# EAGLE board tudoJunto (EAGLE 9.6.2)
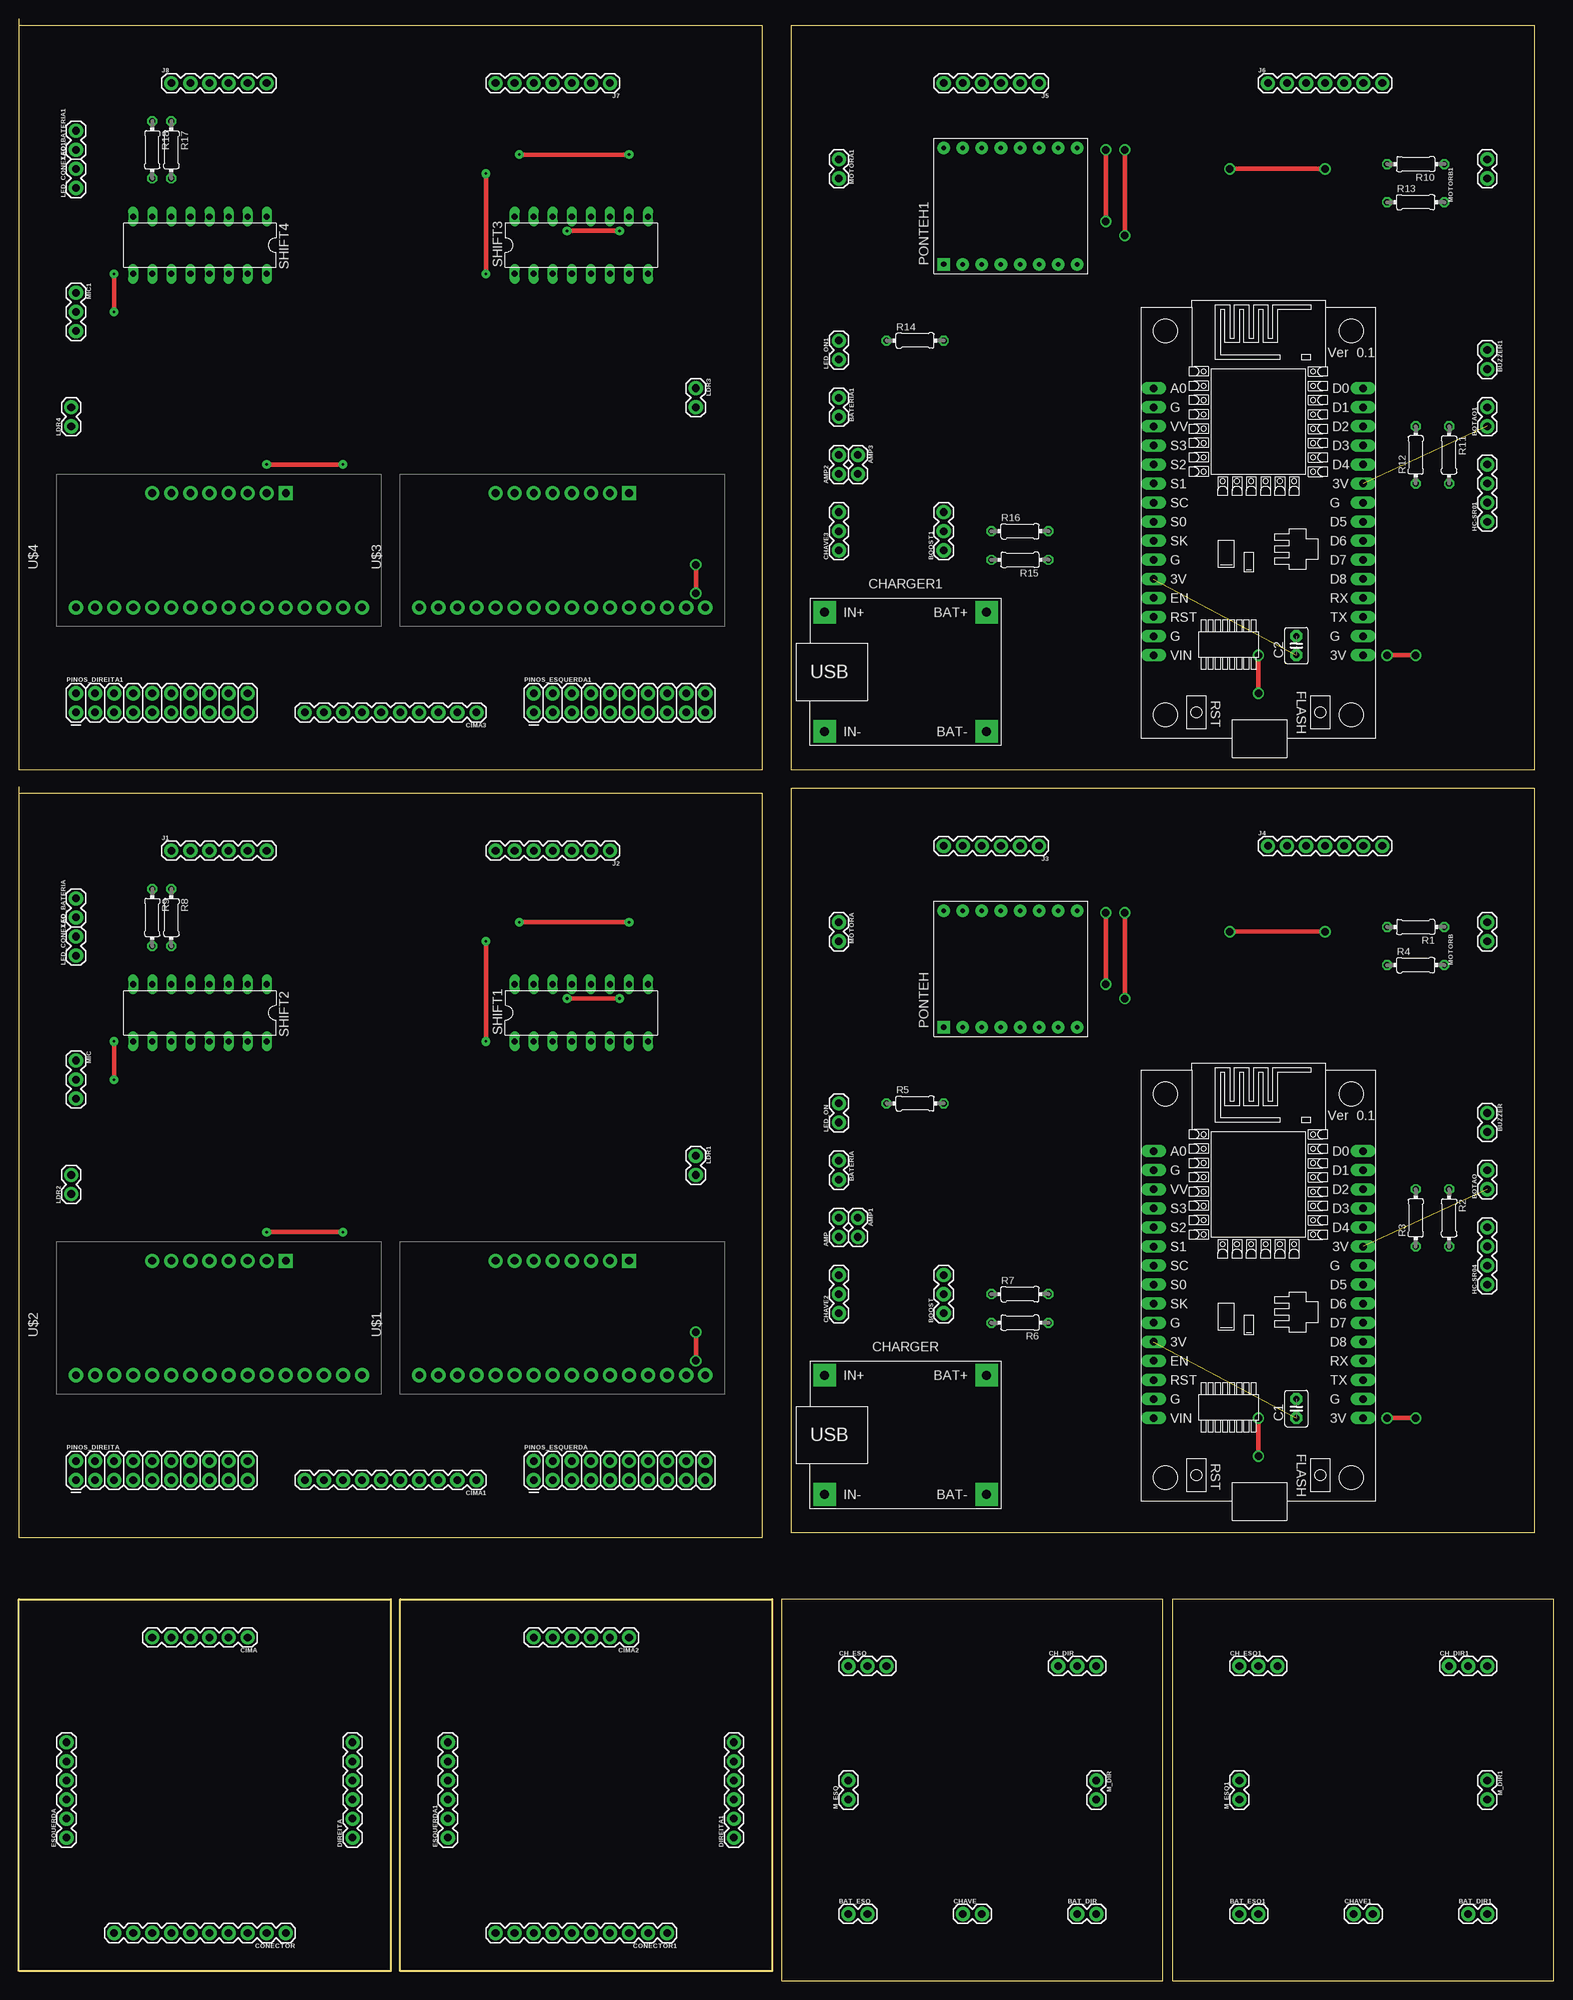
[diagram p0: board, top side]
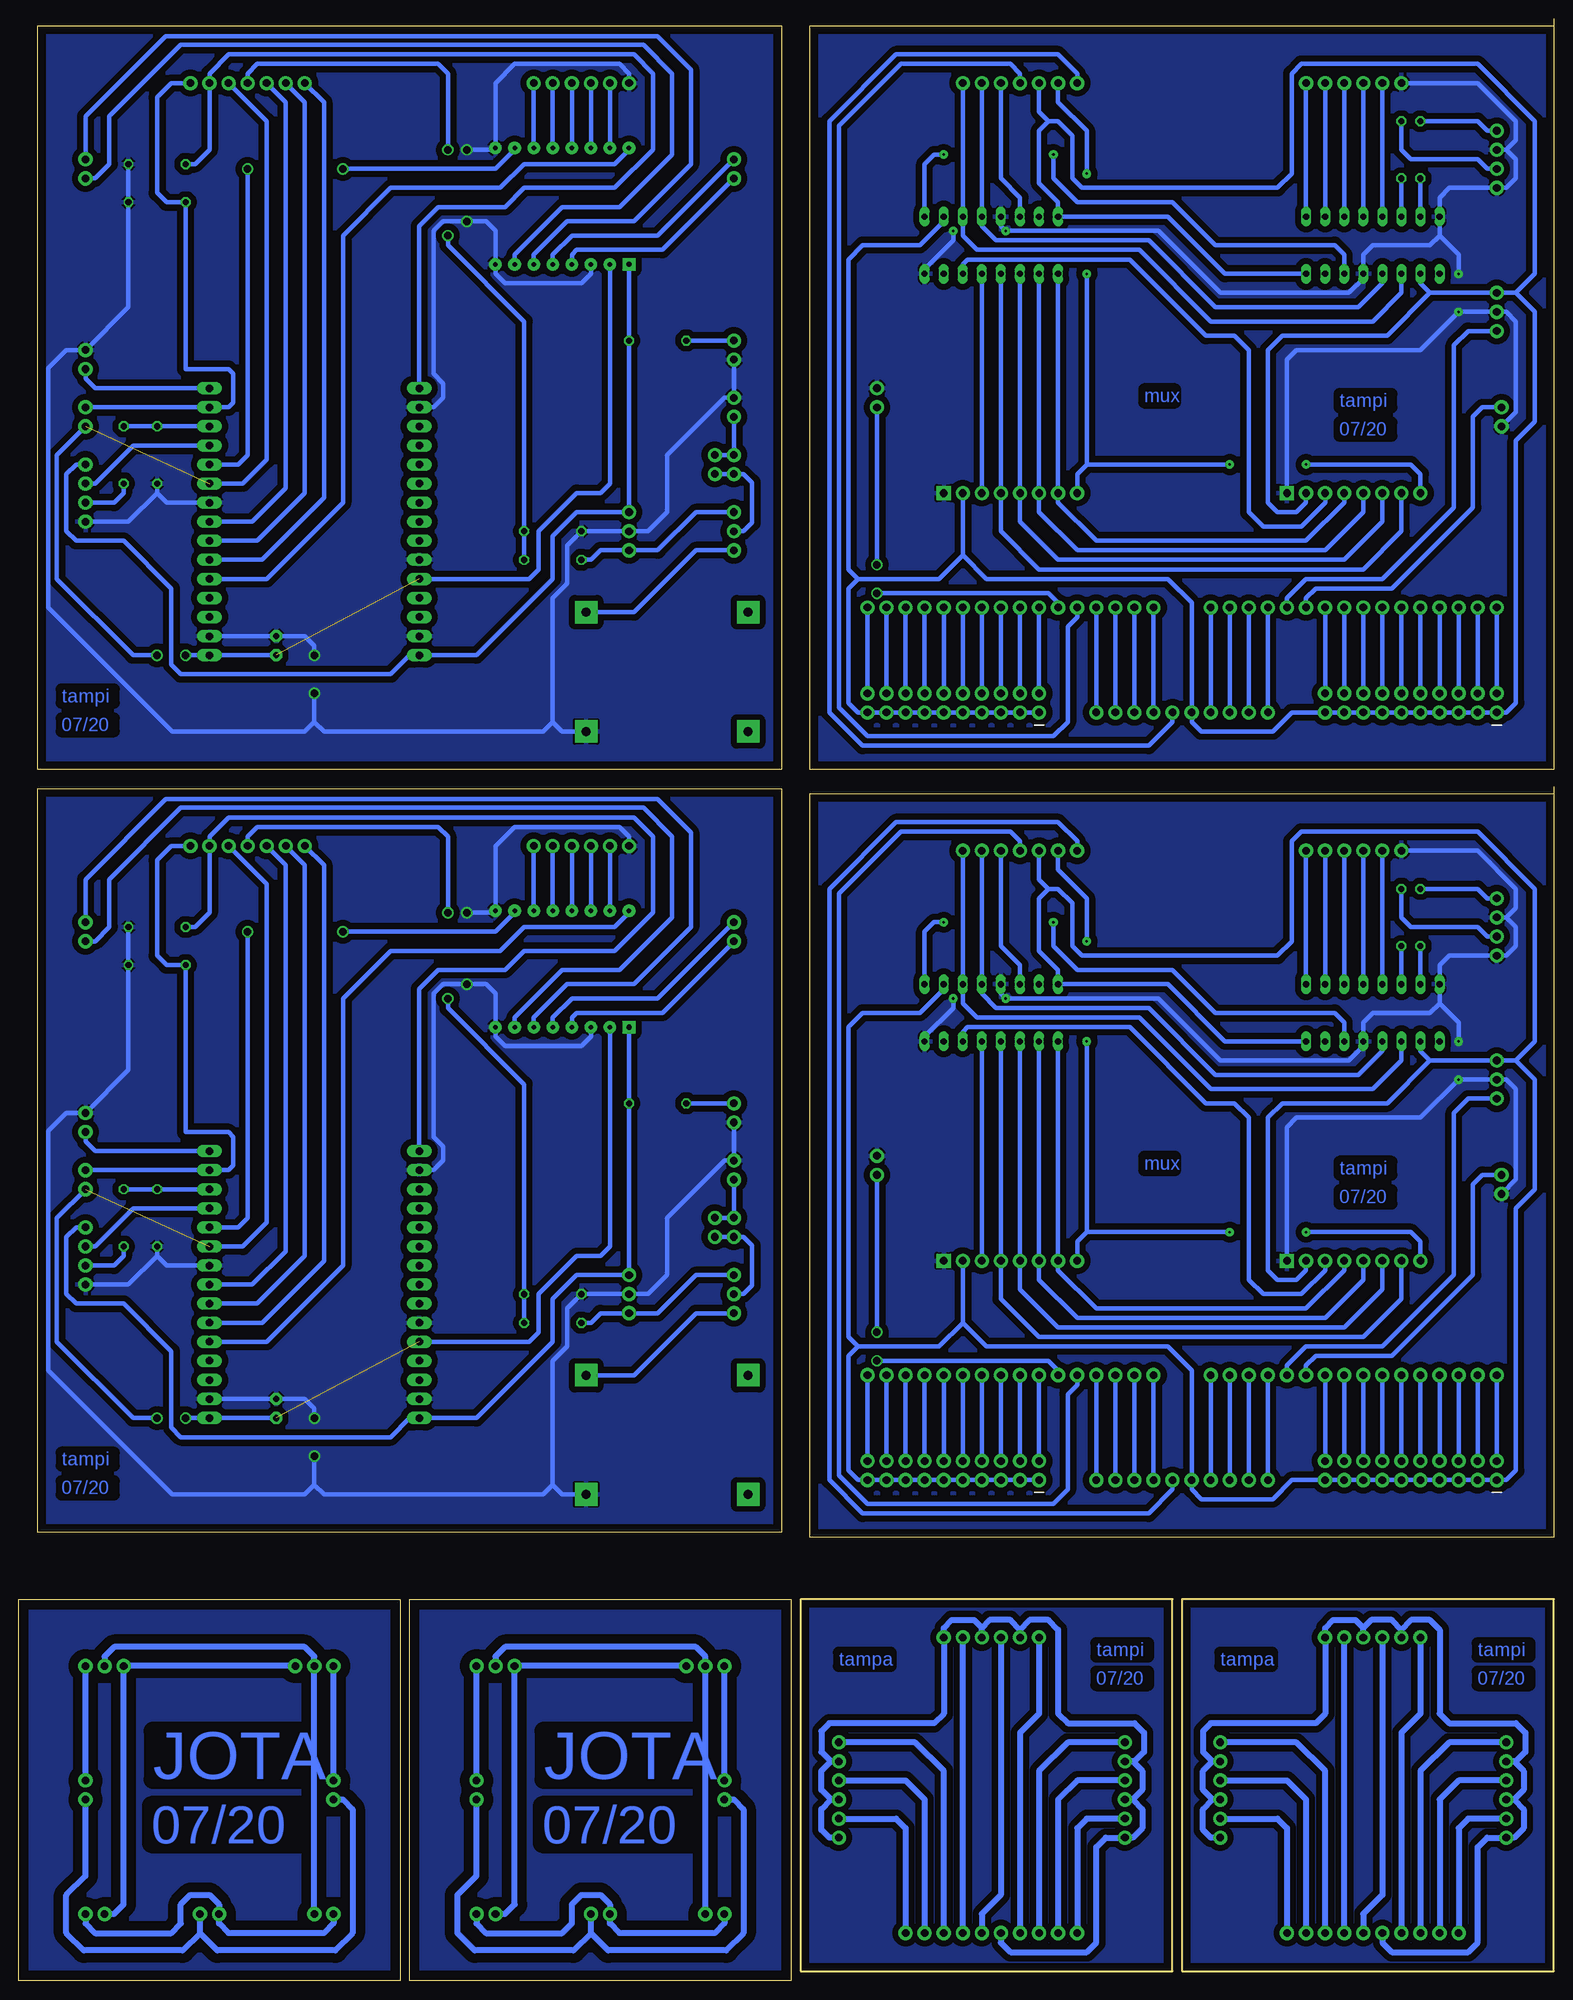
[diagram p1: board, bottom side, seen from below]

Size 204.47 x 261.29 mm. Coordinates in mm from the lower left corner, seen from the top.
Outline: 0,159.06 0,158.12
Outline: 0,158.12 0,59.06 99.06,59.06 99.06,158.12 0,158.12
Outline: 0,261.29 0,260.35
Outline: 0,260.35 0,161.29 99.06,161.29 99.06,260.35 0,260.35
Outline: 0,1.27 0,50.8 49.53,50.8 49.53,1.27 0,1.27
Outline: 50.8,1.27 50.8,50.8 100.33,50.8 100.33,1.27 50.8,1.27
Outline: 101.6,0 152.4,0 152.4,50.8 101.6,50.8 101.6,0
Outline: 153.67,0 204.47,0 204.47,50.8 153.67,50.8 153.67,0
Outline: 102.87,59.69 201.93,59.69 201.93,158.75 102.87,158.75 102.87,59.69
Outline: 102.87,161.29 201.93,161.29 201.93,260.35 102.87,260.35 102.87,161.29
Copper layers (1*16): Top 0.035mm / dielectric 1.5mm / Bottom 0.035mm
Design rules "default": minimum track width 6mil, minimum drill 0.35mm, track to track 6mil, track to pad 6mil, pad to pad 6mil, via to via 6mil, smd to smd 6mil, copper to edge 40mil, drill to drill 6mil, minimum pad ring 10mil, minimum via ring 8mil, stop-mask expansion 4mil, vias tented up to drill 0mil, thermal gap 10mil

## Footprints (pad centres in the part's own frame; a part is rotated, then mirrored left to right if it is on the bottom)
1X02 = drill 1.016 pad 1.88: 1 0,0; 2 2.54,0
1X03 = drill 1.016 pad 1.88: 1 0,0; 2 2.54,0; 3 5.08,0
C2.5-3 = drill 0.813 pad 1.6 octagon: 1 -1.27,0; 2 1.27,0
BATTERY-CHARGER-LI-5V = drill 1.2 pad 3 square: BAT+ 10.795,8.255; BAT- 10.795,-7.62; IN+ -10.795,8.255; IN- -10.795,-7.62
1X06 = drill 1.016 pad 1.88: 1 0,0; 2 2.54,0; 3 5.08,0; 4 7.62,0; 5 10.16,0; 6 12.7,0
1X10 = drill 1.016 pad 1.88: 1 0,0; 2 2.54,0; 3 5.08,0; 4 7.62,0; 5 10.16,0; 6 12.7,0; 7 15.24,0; 8 17.78,0; 9 20.32,0; 10 22.86,0
1X04 = drill 1.016 pad 1.88: 1 0,0; 2 2.54,0; 3 5.08,0; 4 7.62,0
1X07 = drill 1.016 pad 1.88: 1 0,0; 2 2.54,0; 3 5.08,0; 4 7.62,0; 5 10.16,0; 6 12.7,0; 7 15.24,0
NODEMCU = drill 1 pad 1.676 long: 1 -13.97,17.78; 2 -13.97,15.24; 3 -13.97,12.7; 4 -13.97,10.16; 5 -13.97,7.62; 6 -13.97,5.08; 7 -13.97,2.54; 8 -13.97,0; 9 -13.97,-2.54; 10 -13.97,-5.08; 11 -13.97,-7.62; 12 -13.97,-10.16; 13 -13.97,-12.7; 14 -13.97,-15.24; 15 -13.97,-17.78; 16 13.97,-17.78; 17 13.97,-15.24; 18 13.97,-12.7; 19 13.97,-10.16; 20 13.97,-7.62; 21 13.97,-5.08; 22 13.97,-2.54; 23 13.97,0; 24 13.97,2.54; 25 13.97,5.08; 26 13.97,7.62; 27 13.97,10.16; 28 13.97,12.7; 29 13.97,15.24; 30 13.97,17.78
2X10 = drill 1.016 pad 1.88: 1 0,0; 2 0,2.54; 3 2.54,0; 4 2.54,2.54; 5 5.08,0; 6 5.08,2.54; 7 7.62,0; 8 7.62,2.54; 9 10.16,0; 10 10.16,2.54; 11 12.7,0; 12 12.7,2.54; 13 15.24,0; 14 15.24,2.54; 15 17.78,0; 16 17.78,2.54; 17 20.32,0; 18 20.32,2.54; 19 22.86,0; 20 22.86,2.54
TB6612FNG = drill 0.6 pad 1.676: A1 -7.62,-1.27; A2 -7.62,-3.81; AIN1 7.874,1.27; AIN2 7.874,3.81; B1 -7.62,-8.89; B2 -7.62,-6.35; BIN1 7.874,-3.81; BIN2 7.874,-6.35; GND1 -7.62,1.27; GND2 -7.62,-11.43; GND3 7.874,-11.43; PWMA 7.874,6.35; PWMB 7.874,-8.89; STBY 7.874,-1.27; VCC -7.62,3.81 | drill 0.7 pad 1.676 square: VM -7.62,6.35
0204/7 = drill 0.813 octagon: 1 -3.81,0; 2 3.81,0
DIL16 = drill 0.813 long: 1 -8.89,-3.81; 2 -6.35,-3.81; 3 -3.81,-3.81; 4 -1.27,-3.81; 5 1.27,-3.81; 6 3.81,-3.81; 7 6.35,-3.81; 8 8.89,-3.81; 9 8.89,3.81; 10 6.35,3.81; 11 3.81,3.81; 12 1.27,3.81; 13 -1.27,3.81; 14 -3.81,3.81; 15 -6.35,3.81; 16 -8.89,3.81
4067_MODULE = drill 1.016 pad 1.88: C0 -8.89,-19.05; C1 -8.89,-16.51; C2 -8.89,-13.97; C3 -8.89,-11.43; C4 -8.89,-8.89; C5 -8.89,-6.35; C6 -8.89,-3.81; C7 -8.89,-1.27; C8 -8.89,1.27; C9 -8.89,3.81; C10 -8.89,6.35; C11 -8.89,8.89; C12 -8.89,11.43; C13 -8.89,13.97; C14 -8.89,16.51; C15 -8.89,19.05; EN 6.35,-3.81; S0 6.35,-1.27; S1 6.35,1.27; S2 6.35,3.81; S3 6.35,6.35; SIG 6.35,8.89; VCC 6.35,-6.35 | drill 1.016 pad 1.88 square: GND 6.35,-8.89

## Placement (x,y rotation side)
AMP  [1X02]  109.22,99.06 90 top
AMP1  [1X02]  111.76,101.6 270 top
AMP2  [1X02]  109.22,200.66 90 top
AMP3  [1X02]  111.76,203.2 270 top
BAT_DIR  [1X02]  140.97,8.89 0 top
BAT_DIR1  [1X02]  193.04,8.89 0 top
BAT_ESQ  [1X02]  110.49,8.89 0 top
BAT_ESQ1  [1X02]  162.56,8.89 0 top
BATERIA  [1X02]  109.22,109.22 270 top
BATERIA1  [1X02]  109.22,210.82 270 top
BOOST  [1X03]  123.19,88.9 90 top
BOOST1  [1X03]  123.19,190.5 90 top
BOTAO  [1X02]  195.58,105.41 90 top
BOTAO1  [1X02]  195.58,207.01 90 top
BUZZER  [1X02]  195.58,115.57 270 top
BUZZER1  [1X02]  195.58,217.17 270 top
C1  10u  [C2.5-3]  170.18,76.2 90 top
C2  10u  [C2.5-3]  170.18,177.8 90 top
CH_DIR  [1X03]  138.43,41.91 0 top
CH_DIR1  [1X03]  190.5,41.91 0 top
CH_ESQ  [1X03]  110.49,41.91 0 top
CH_ESQ1  [1X03]  162.56,41.91 0 top
CHARGER  BATTERY-CHARGER-LI-5V  [BATTERY-CHARGER-LI-5V]  118.11,72.39 0 top
CHARGER1  BATTERY-CHARGER-LI-5V  [BATTERY-CHARGER-LI-5V]  118.11,173.99 0 top
CHAVE  [1X02]  125.73,8.89 0 top
CHAVE1  [1X02]  177.8,8.89 0 top
CHAVE2  [1X03]  109.22,88.9 90 top
CHAVE3  [1X03]  109.22,190.5 90 top
CIMA  [1X06]  30.48,45.72 180 top
CIMA1  [1X10]  60.96,66.68 180 top
CIMA2  [1X06]  81.28,45.72 180 top
CIMA3  [1X10]  60.96,168.91 180 top
CONECTOR  [1X10]  35.56,6.35 180 top
CONECTOR1  [1X10]  86.36,6.35 180 top
DIREITA  [1X06]  44.45,19.05 90 top
DIREITA1  [1X06]  95.25,19.05 90 top
ESQUERDA  [1X06]  6.35,19.05 90 top
ESQUERDA1  [1X06]  57.15,19.05 90 top
HC-SR01  [1X04]  195.58,194.31 90 top
HC-SR04  [1X04]  195.58,92.71 90 top
J1  [1X06]  20.32,150.5 0 top
J2  [1X07]  78.74,150.5 180 top
J3  [1X06]  135.89,151.13 180 top
J4  [1X07]  166.37,151.13 0 top
J5  [1X06]  135.89,252.73 180 top
J6  [1X07]  166.37,252.73 0 top
J7  [1X07]  78.74,252.73 180 top
J8  [1X06]  20.32,252.73 0 top
LDR1  [1X02]  90.17,109.86 270 top
LDR2  [1X02]  6.98,104.78 90 top
LDR3  [1X02]  90.17,212.09 270 top
LDR4  [1X02]  6.98,207.01 90 top
LED_BATERIA  [1X02]  7.62,141.61 90 top
LED_BATERIA1  [1X02]  7.62,243.84 90 top
LED_CONEXAO  [1X02]  7.62,136.53 90 top
LED_CONEXAO1  [1X02]  7.62,238.76 90 top
LED_ON  [1X02]  109.22,114.3 90 top
LED_ON1  [1X02]  109.22,215.9 90 top
M_DIR  [1X02]  143.51,26.67 270 top
M_DIR1  [1X02]  195.58,26.67 270 top
M_ESQ  [1X02]  110.49,24.13 90 top
M_ESQ1  [1X02]  162.56,24.13 90 top
MIC  [1X03]  7.62,122.56 270 top
MIC1  [1X03]  7.62,224.79 270 top
MOTORA  [1X02]  109.22,140.97 270 top
MOTORA1  [1X02]  109.22,242.57 270 top
MOTORB  [1X02]  195.58,138.43 90 top
MOTORB1  [1X02]  195.58,240.03 90 top
NODEMCU  NODEMCU  [NODEMCU]  165.1,92.71 0 top
NODEMCU1  NODEMCU  [NODEMCU]  165.1,194.31 0 top
PINOS_DIREITA  [2X10]  7.62,66.68 0 top
PINOS_DIREITA1  [2X10]  7.62,168.91 0 top
PINOS_ESQUERDA  [2X10]  68.58,66.68 0 top
PINOS_ESQUERDA1  [2X10]  68.58,168.91 0 top
PONTEH  TB6612FNG  [TB6612FNG]  129.54,134.62 90 top
PONTEH1  TB6612FNG  [TB6612FNG]  129.54,236.22 90 top
R1  4.7K  [0204/7]  186.06,140.34 180 top
R2  1.1K  [0204/7]  190.5,101.6 270 top
R3  2.2K  [0204/7]  186.06,101.6 90 top
R4  10K  [0204/7]  186.06,135.25 0 top
R5  10K  [0204/7]  119.38,116.84 0 top
R6  100K  [0204/7]  133.35,87.63 180 top
R7  100K  [0204/7]  133.35,91.44 0 top
R8  10K  [0204/7]  20.32,141.61 270 top
R9  10K  [0204/7]  17.78,141.61 270 top
R10  4.7K  [0204/7]  186.06,241.94 180 top
R11  1.1K  [0204/7]  190.5,203.2 270 top
R12  2.2K  [0204/7]  186.06,203.2 90 top
R13  10K  [0204/7]  186.06,236.86 0 top
R14  10K  [0204/7]  119.38,218.44 0 top
R15  100K  [0204/7]  133.35,189.23 180 top
R16  100K  [0204/7]  133.35,193.04 0 top
R17  10K  [0204/7]  20.32,243.84 270 top
R18  10K  [0204/7]  17.78,243.84 270 top
SHIFT1  74HC595N  [DIL16]  74.93,128.91 0 top
SHIFT2  74HC595N  [DIL16]  24.13,128.91 180 top
SHIFT3  74HC595N  [DIL16]  74.93,231.14 0 top
SHIFT4  74HC595N  [DIL16]  24.13,231.14 180 top
U$1  [4067_MODULE]  72.39,89.54 90 top
U$2  [4067_MODULE]  26.67,89.54 90 top
U$3  [4067_MODULE]  72.39,191.77 90 top
U$4  [4067_MODULE]  26.67,191.77 90 top

## Library data of the parts
AMP AMP1-AMP3 BAT_DIR BAT_DIR1 BAT_ESQ BAT_ESQ1 BATERIA BATERIA1 BOOST BOOST1 BOTAO BOTAO1 BUZZER BUZZER1 CH_DIR CH_DIR1 CH_ESQ CH_ESQ1 CHAVE CHAVE1-CHAVE3 J2 J4 J6 J7 LDR1-LDR4 LED_BATERIA LED_BATERIA1 LED_CONEXAO LED_CONEXAO1 LED_ON LED_ON1 M_DIR M_DIR1 M_ESQ M_ESQ1 MIC MIC1 MOTORA MOTORA1 MOTORB MOTORB1 PINOS_DIREITA PINOS_DIREITA1 PINOS_ESQUERDA PINOS_ESQUERDA1 = SparkFun-Connectors
C1 C2 = capacitor-wima
CHARGER CHARGER1 = diy-modules
CIMA CIMA2 DIREITA DIREITA1 ESQUERDA ESQUERDA1 J1 J3 J5 J8 = SparkFun-Connectors; PROD_ID: CONN-08437
CIMA1 CIMA3 CONECTOR CONECTOR1 = SparkFun-Connectors; PROD_ID: CONN-11563
HC-SR01 HC-SR04 = SparkFun-Connectors; PROD_ID: CONN-09696
NODEMCU NODEMCU1 = nodemcu
PONTEH PONTEH1 = TB6612FNG
R1-R18 = rcl; SPICEPREFIX: R
SHIFT1-SHIFT4 = 74xx-eu
U$1-U$4 = personal

## Nets
+3V1: BOTAO.1 C1.1 J4.5 NODEMCU.11 NODEMCU.16 NODEMCU.25 PONTEH.VCC
+3V2: BOTAO1.1 C2.1 J6.5 NODEMCU1.11 NODEMCU1.16 NODEMCU1.25 PONTEH1.VCC
+3V3: CIMA1.6 J2.5 MIC.1 PINOS_DIREITA.1 PINOS_DIREITA.3 PINOS_DIREITA.5 PINOS_DIREITA.7 PINOS_DIREITA.9 PINOS_DIREITA.11 PINOS_DIREITA.13 PINOS_DIREITA.15 PINOS_DIREITA.17 PINOS_DIREITA.19 PINOS_ESQUERDA.1 PINOS_ESQUERDA.3 PINOS_ESQUERDA.5 PINOS_ESQUERDA.7 PINOS_ESQUERDA.9 PINOS_ESQUERDA.11 PINOS_ESQUERDA.13 PINOS_ESQUERDA.15 PINOS_ESQUERDA.17 PINOS_ESQUERDA.19 SHIFT1.10 SHIFT1.16 SHIFT2.10 SHIFT2.16 U$1.VCC U$2.VCC
+3V4: CIMA3.6 J7.5 MIC1.1 PINOS_DIREITA1.1 PINOS_DIREITA1.3 PINOS_DIREITA1.5 PINOS_DIREITA1.7 PINOS_DIREITA1.9 PINOS_DIREITA1.11 PINOS_DIREITA1.13 PINOS_DIREITA1.15 PINOS_DIREITA1.17 PINOS_DIREITA1.19 PINOS_ESQUERDA1.1 PINOS_ESQUERDA1.3 PINOS_ESQUERDA1.5 PINOS_ESQUERDA1.7 PINOS_ESQUERDA1.9 PINOS_ESQUERDA1.11 PINOS_ESQUERDA1.13 PINOS_ESQUERDA1.15 PINOS_ESQUERDA1.17 PINOS_ESQUERDA1.19 SHIFT3.10 SHIFT3.16 SHIFT4.10 SHIFT4.16 U$3.VCC U$4.VCC
+5V: BOOST.3 HC-SR04.4 NODEMCU.15 PONTEH.VM R5.2
+5V1: BOOST1.3 HC-SR01.4 NODEMCU1.15 PONTEH1.VM R14.2
+UB: AMP1.1 AMP.2 BATERIA.2
+UB1: AMP2.2 AMP3.1 BATERIA1.2
A0: J2.6 U$1.SIG U$2.SIG
A1: J4.6 NODEMCU.1 R1.2
A2: J6.6 NODEMCU1.1 R10.2
A3: J7.6 U$3.SIG U$4.SIG
AIN1: J1.5 SHIFT2.2
AIN2: J1.6 SHIFT2.1
AIN3: J3.5 PONTEH.AIN2
AIN4: J3.4 PONTEH.AIN1
AIN5: J5.5 PONTEH1.AIN2
AIN6: J5.4 PONTEH1.AIN1
AIN7: J8.6 SHIFT4.1
AIN8: J8.5 SHIFT4.2
BAT: J2.4 U$1.C11
BAT1: J4.4 R6.1 R7.2
BAT2: J6.4 R15.1 R16.2
BAT3: J7.4 U$3.C11
BIN1: J1.3 SHIFT2.4
BIN2: J1.2 SHIFT2.5
BIN3: J3.2 PONTEH.BIN1
BIN4: J3.1 PONTEH.BIN2
BIN5: J5.2 PONTEH1.BIN1
BIN6: J5.1 PONTEH1.BIN2
BIN7: J8.3 SHIFT4.4
BIN8: J8.2 SHIFT4.5
BOOST: BOOST.1 CHAVE2.3 R6.2
BOOST1: BOOST1.1 CHAVE3.3 R15.2
BOTAO: CIMA.4 CONECTOR.5
BOTAO1: CIMA1.5 J2.7
BOTAO2: CIMA2.4 CONECTOR1.5
BOTAO3: BOTAO.2 J4.7 NODEMCU.29 R4.1
BOTAO4: BOTAO1.2 J6.7 NODEMCU1.29 R13.1
BOTAO5: CIMA3.5 J7.7
BUZZER: BUZZER.2 NODEMCU.30
BUZZER1: BUZZER1.2 NODEMCU1.30
CHARGER: CHARGER.BAT+ CHAVE2.1
CHARGER1: CHARGER1.BAT+ CHAVE3.1
CLK: J2.1 SHIFT1.11 SHIFT2.11
CLK1: J4.1 NODEMCU.21
CLK2: J6.1 NODEMCU1.21
CLK3: J7.1 SHIFT3.11 SHIFT4.11
DATA: J2.3 SHIFT1.14
DATA1: J4.3 NODEMCU.23
DATA2: J6.3 NODEMCU1.23
DATA3: J7.3 SHIFT3.14
ECHO: HC-SR04.2 R2.2
ECHO1: HC-SR01.2 R11.2
EN1: SHIFT1.5 U$1.EN
EN2: SHIFT1.6 U$2.EN
EN3: SHIFT3.5 U$3.EN
EN4: SHIFT3.6 U$4.EN
GND1: J1.1 LDR1.1 LDR2.1 LED_BATERIA.1 LED_CONEXAO.1 MIC.2 SHIFT1.8 SHIFT1.13 SHIFT2.8 SHIFT2.13 U$1.GND U$2.GND
GND5: BATERIA.1 BOOST.2 BUZZER.1 C1.2 CHARGER.BAT- HC-SR04.1 J3.6 LED_ON.1 NODEMCU.2 NODEMCU.10 NODEMCU.14 NODEMCU.17 NODEMCU.24 PONTEH.GND1 PONTEH.GND2 PONTEH.GND3 R1.1 R3.1 R4.2 R7.1
GND6: BATERIA1.1 BOOST1.2 BUZZER1.1 C2.2 CHARGER1.BAT- HC-SR01.1 J5.6 LED_ON1.1 NODEMCU1.2 NODEMCU1.10 NODEMCU1.14 NODEMCU1.17 NODEMCU1.24 PONTEH1.GND1 PONTEH1.GND2 PONTEH1.GND3 R10.1 R12.1 R13.2 R16.1
GND7: J8.1 LDR3.1 LDR4.1 LED_BATERIA1.1 LED_CONEXAO1.1 MIC1.2 SHIFT3.8 SHIFT3.13 SHIFT4.8 SHIFT4.13 U$3.GND U$4.GND
LATCH: J2.2 SHIFT1.12 SHIFT2.12
LATCH1: J4.2 NODEMCU.22
LATCH2: J6.2 NODEMCU1.22
LATCH3: J7.2 SHIFT3.12 SHIFT4.12
LDR1: LDR1.2 U$1.C10
LDR2: LDR2.2 U$2.C5
LDR3: LDR3.2 U$3.C10
LDR4: LDR4.2 U$4.C5
LED_BATERIA: R9.2 SHIFT2.7
LED_BATERIA1: R18.2 SHIFT4.7
LED_CONEXAO: R8.2 SHIFT2.6
LED_CONEXAO1: R17.2 SHIFT4.6
MIC: MIC.3 U$2.C4
MIC1: MIC1.3 U$4.C4
N$1: PINOS_ESQUERDA.2 U$1.C9
N$2: PINOS_ESQUERDA.4 U$1.C8
N$3: PINOS_ESQUERDA.6 U$1.C7
N$4: PINOS_ESQUERDA.8 U$1.C6
N$5: SHIFT1.9 SHIFT2.14
N$6: PINOS_ESQUERDA.10 U$1.C5
N$7: PINOS_ESQUERDA.12 U$1.C4
N$8: PINOS_DIREITA.2 U$2.C15
N$9: PINOS_DIREITA.4 U$2.C14
N$10: PINOS_DIREITA.6 U$2.C13
N$11: PINOS_DIREITA.8 U$2.C12
N$12: PINOS_DIREITA.10 U$2.C11
N$13: PINOS_DIREITA.12 U$2.C10
N$14: PINOS_DIREITA.14 U$2.C9
N$15: PINOS_DIREITA.16 U$2.C8
N$16: PINOS_DIREITA.18 U$2.C7
N$17: PINOS_DIREITA.20 U$2.C6
N$18: PINOS_ESQUERDA.14 U$1.C3
N$19: PINOS_ESQUERDA.16 U$1.C2
N$20: PINOS_ESQUERDA.18 U$1.C1
N$21: PINOS_ESQUERDA.20 U$1.C0
N$22: LED_CONEXAO.2 R8.1
N$23: LED_BATERIA.2 R9.1
N$24: BAT_ESQ.2 CH_DIR.2 CH_ESQ.2
N$25: BAT_DIR.1 CH_DIR.1 CH_ESQ.3
N$26: CH_DIR.3 M_DIR.1
N$27: CH_ESQ.1 M_ESQ.2
N$28: CHAVE.2 M_DIR.2 M_ESQ.1
N$29: BAT_DIR.2 BAT_ESQ.1 CHAVE.1
N$30: BAT_ESQ1.2 CH_DIR1.2 CH_ESQ1.2
N$31: BAT_DIR1.1 CH_DIR1.1 CH_ESQ1.3
N$32: CH_DIR1.3 M_DIR1.1
N$33: CH_ESQ1.1 M_ESQ1.2
N$34: CHAVE1.2 M_DIR1.2 M_ESQ1.1
N$35: BAT_DIR1.2 BAT_ESQ1.1 CHAVE1.1
N$36: MOTORB.2 PONTEH.B2
N$37: MOTORB.1 PONTEH.B1
N$38: SHIFT1.15
N$39: MOTORA.2 PONTEH.A1
N$40: MOTORA.1 PONTEH.A2
N$41: NODEMCU.28 R2.1 R3.2
N$42: LED_ON.2 R5.1
N$43: MOTORB1.2 PONTEH1.B2
N$44: MOTORB1.1 PONTEH1.B1
N$45: MOTORA1.2 PONTEH1.A1
N$46: SHIFT1.7
N$47: SHIFT2.15
N$48: MOTORA1.1 PONTEH1.A2
N$49: NODEMCU1.28 R11.1 R12.2
N$50: LED_ON1.2 R14.1
N$51: SHIFT3.9 SHIFT4.14
N$52: SHIFT3.15
N$53: SHIFT3.7
N$54: SHIFT4.15
N$55: PINOS_ESQUERDA1.2 U$3.C9
N$56: PINOS_ESQUERDA1.4 U$3.C8
N$57: PINOS_ESQUERDA1.6 U$3.C7
N$58: PINOS_ESQUERDA1.8 U$3.C6
N$59: PINOS_ESQUERDA1.10 U$3.C5
N$60: PINOS_ESQUERDA1.12 U$3.C4
N$61: PINOS_ESQUERDA1.14 U$3.C3
N$62: PINOS_ESQUERDA1.16 U$3.C2
N$63: PINOS_ESQUERDA1.18 U$3.C1
N$64: PINOS_ESQUERDA1.20 U$3.C0
N$65: PINOS_DIREITA1.2 U$4.C15
N$66: PINOS_DIREITA1.4 U$4.C14
N$67: PINOS_DIREITA1.6 U$4.C13
N$68: PINOS_DIREITA1.8 U$4.C12
N$69: PINOS_DIREITA1.10 U$4.C11
N$70: PINOS_DIREITA1.12 U$4.C10
N$71: PINOS_DIREITA1.14 U$4.C9
N$72: PINOS_DIREITA1.16 U$4.C8
N$73: PINOS_DIREITA1.18 U$4.C7
N$74: PINOS_DIREITA1.20 U$4.C6
N$75: LED_CONEXAO1.2 R17.1
N$76: LED_BATERIA1.2 R18.1
PWMA: NODEMCU.20 PONTEH.PWMA
PWMA1: NODEMCU1.20 PONTEH1.PWMA
PWMB: NODEMCU.26 PONTEH.PWMB
PWMB1: NODEMCU1.26 PONTEH1.PWMB
S0: SHIFT1.4 U$1.S0 U$2.S3
S1: SHIFT1.3 U$1.S1 U$2.S2
S2: SHIFT1.2 U$1.S2 U$2.S1
S3: SHIFT1.1 U$1.S3 U$2.S0
S4: SHIFT3.1 U$3.S3 U$4.S0
S5: SHIFT3.2 U$3.S2 U$4.S1
S6: SHIFT3.3 U$3.S1 U$4.S2
S7: SHIFT3.4 U$3.S0 U$4.S3
STBY: J1.4 SHIFT2.3
STBY1: J3.3 PONTEH.STBY
STBY2: J5.3 PONTEH1.STBY
STBY3: J8.4 SHIFT4.3
T1: CONECTOR.8 ESQUERDA.6
T2: CIMA.6 CONECTOR.7
T3: CIMA.2 CONECTOR.4
T4: CONECTOR.3 DIREITA.6
T5: CONECTOR.2 DIREITA.4
T6: CONECTOR.1 DIREITA.2
T7: CONECTOR.10 ESQUERDA.2
T8: CONECTOR.9 ESQUERDA.4
T9: CIMA1.10 U$2.C3
T10: CIMA1.9 U$2.C2
T11: CIMA1.8 U$2.C1
T12: CIMA1.7 U$2.C0
T13: CIMA1.4 U$1.C15
T14: CIMA1.3 U$1.C14
T15: CIMA1.2 U$1.C13
T16: CIMA1.1 U$1.C12
T17: CONECTOR1.10 ESQUERDA1.2
T18: CONECTOR1.8 ESQUERDA1.6
T19: CIMA2.6 CONECTOR1.7
T20: CIMA2.2 CONECTOR1.4
T21: CONECTOR1.3 DIREITA1.6
T22: CONECTOR1.2 DIREITA1.4
T23: CONECTOR1.1 DIREITA1.2
T24: CONECTOR1.9 ESQUERDA1.4
T25: CIMA3.10 U$4.C3
T26: CIMA3.9 U$4.C2
T27: CIMA3.8 U$4.C1
T28: CIMA3.7 U$4.C0
T29: CIMA3.4 U$3.C15
T30: CIMA3.3 U$3.C14
T31: CIMA3.2 U$3.C13
T32: CIMA3.1 U$3.C12
TRIG: HC-SR04.3 NODEMCU.27
TRIG1: HC-SR01.3 NODEMCU1.27
VAMP: AMP1.2 AMP.1 CHAVE2.2
VAMP1: AMP2.1 AMP3.2 CHAVE3.2
VCC: CIMA.1 CIMA.3 CIMA.5 CONECTOR.6 DIREITA.1 DIREITA.3 DIREITA.5 ESQUERDA.1 ESQUERDA.3 ESQUERDA.5
VCC1: CIMA2.1 CIMA2.3 CIMA2.5 CONECTOR1.6 DIREITA1.1 DIREITA1.3 DIREITA1.5 ESQUERDA1.1 ESQUERDA1.3 ESQUERDA1.5

## Tracks (layer width: path | path; a pad name or v marks a point on that pad's centre or on a via)
+3V1  (via drill 1 pad 1.3)  (2 unrouted)
  Top 0.61: v186.06,74.93 v182.25,74.93
  Bottom 0.61: PONTEH.VCC 125.73,97.79 127,96.52 130.18,96.52 135.26,91.44 135.26,86.36 136.53,85.09 NODEMCU.11 | C1.1 NODEMCU.16 v182.25,74.93 | BOTAO.1 199.39,101.6 199.39,85.09 189.23,74.93 v186.06,74.93 | J4.5 171.45,146.05 171.45,100.97 174.62,97.79 NODEMCU.25
+3V2  (via drill 1 pad 1.3)  (2 unrouted)
  Top 0.61: v186.06,176.53 v182.25,176.53
  Bottom 0.61: PONTEH1.VCC 125.73,199.39 127,198.12 130.18,198.12 135.26,193.04 135.26,187.96 136.53,186.69 NODEMCU1.11 | C2.1 NODEMCU1.16 v182.25,176.53 | BOTAO1.1 199.39,203.2 199.39,186.69 189.23,176.53 v186.06,176.53 | J6.5 171.45,247.65 171.45,202.56 174.62,199.39 NODEMCU1.25
+3V3
  Bottom 0.61: PINOS_ESQUERDA.1 PINOS_ESQUERDA.3 PINOS_ESQUERDA.5 PINOS_ESQUERDA.7 PINOS_ESQUERDA.9 PINOS_ESQUERDA.11 PINOS_ESQUERDA.13 PINOS_ESQUERDA.15 PINOS_ESQUERDA.17 PINOS_ESQUERDA.19 92.71,66.68 93.98,67.95 93.98,83.19 92.71,84.45 | 5.08,122.56 2.54,120.02 2.54,105.41 5.08,102.87 5.08,67.95 6.35,66.68 PINOS_DIREITA.1 PINOS_DIREITA.3 PINOS_DIREITA.5 PINOS_DIREITA.7 PINOS_DIREITA.9 PINOS_DIREITA.11 PINOS_DIREITA.13 PINOS_DIREITA.15 PINOS_DIREITA.17 PINOS_DIREITA.19 34.93,66.68 37.47,64.14 46.99,64.14 48.26,65.41 CIMA1.6 48.26,81.28 51.44,84.45 75.56,84.45 78.74,87.63 | 5.08,122.56 MIC.1 16.51,122.56 | 16.51,122.56 17.78,123.83 SHIFT2.10 | U$2.VCC 33.02,94.62 34.29,93.34 36.83,93.34 38.1,94.62 38.1,114.94 36.2,116.84 22.22,116.84 16.51,122.56 | U$1.VCC 78.74,87.63 | SHIFT1.10 81.28,132.08 84.45,128.91 92.08,128.91 93.98,127 93.98,85.73 92.71,84.45 | SHIFT2.16 43.82,125.09 51.44,132.72 SHIFT1.16 66.04,134.62 68.58,137.16 68.58,144.15 67.31,145.41 | J2.5 68.58,146.69 67.31,145.41 | 67.31,145.41 66.04,145.41 64.14,143.51 64.14,137.8 62.87,136.53 36.83,136.53 34.93,138.43 34.93,151.77 33.66,153.03 10.16,153.03 2.54,145.41 2.54,125.09 5.08,122.56 | 78.74,87.63 81.91,84.45 92.71,84.45
+3V4
  Bottom 0.61: PINOS_ESQUERDA1.1 PINOS_ESQUERDA1.3 PINOS_ESQUERDA1.5 PINOS_ESQUERDA1.7 PINOS_ESQUERDA1.9 PINOS_ESQUERDA1.11 PINOS_ESQUERDA1.13 PINOS_ESQUERDA1.15 PINOS_ESQUERDA1.17 PINOS_ESQUERDA1.19 92.71,168.91 93.98,170.18 93.98,185.42 92.71,186.69 | 5.08,224.79 2.54,222.25 2.54,207.65 5.08,205.11 5.08,170.18 6.35,168.91 PINOS_DIREITA1.1 PINOS_DIREITA1.3 PINOS_DIREITA1.5 PINOS_DIREITA1.7 PINOS_DIREITA1.9 PINOS_DIREITA1.11 PINOS_DIREITA1.13 PINOS_DIREITA1.15 PINOS_DIREITA1.17 PINOS_DIREITA1.19 34.93,168.91 37.47,166.37 46.99,166.37 48.26,167.64 CIMA3.6 48.26,183.52 51.44,186.69 75.56,186.69 78.74,189.87 | 5.08,224.79 MIC1.1 16.51,224.79 | 16.51,224.79 17.78,226.06 SHIFT4.10 | U$4.VCC 33.02,196.85 34.29,195.58 36.83,195.58 38.1,196.85 38.1,217.17 36.2,219.08 22.22,219.08 16.51,224.79 | U$3.VCC 78.74,189.87 | SHIFT3.10 81.28,234.31 84.45,231.14 92.08,231.14 93.98,229.24 93.98,187.96 92.71,186.69 | SHIFT4.16 43.82,227.33 51.44,234.95 SHIFT3.16 66.04,236.86 68.58,239.39 68.58,246.38 67.31,247.65 | J7.5 68.58,248.92 67.31,247.65 | 67.31,247.65 66.04,247.65 64.14,245.75 64.14,240.03 62.87,238.76 36.83,238.76 34.93,240.67 34.93,254 33.66,255.27 10.16,255.27 2.54,247.65 2.54,227.33 5.08,224.79 | 78.74,189.87 81.91,186.69 92.71,186.69
+5V
  Bottom 0.61: PONTEH.VM R5.2 BOOST.3 130.18,93.98 133.35,90.81 133.35,85.09 143.51,74.93 NODEMCU.15 152.4,74.93 154.94,72.39 182.88,72.39 184.15,73.66 184.15,83.82 190.5,90.17 196.85,90.17 198.12,91.44 198.12,99.06 196.85,100.33 HC-SR04.4
+5V1
  Bottom 0.61: PONTEH1.VM R14.2 BOOST1.3 130.18,195.58 133.35,192.41 133.35,186.69 143.51,176.53 NODEMCU1.15 152.4,176.53 154.94,173.99 182.88,173.99 184.15,175.26 184.15,185.42 190.5,191.77 196.85,191.77 198.12,193.04 198.12,200.66 196.85,201.93 HC-SR01.4
+UB
  Bottom 0.61: BATERIA.2 AMP.2 AMP1.1
+UB1
  Bottom 0.61: BATERIA1.2 AMP2.2 AMP3.1
A0  (via drill 0.35 pad 1.15)
  Top 0.61: v62.23,138.43 v62.23,125.09 | v33.02,99.7 v43.18,99.7
  Bottom 0.61: U$2.SIG 17.78,98.43 19.05,99.7 v33.02,99.7 | U$1.SIG 63.5,98.43 62.23,99.7 | v43.18,99.7 62.23,99.7 | 62.23,99.7 v62.23,125.09 | J2.6 66.04,147.96 62.23,144.15 v62.23,138.43
A1
  Bottom 0.61: R1.2 180.98,140.34 179.07,142.24 J4.6 179.07,152.4 176.53,154.94 122.55,154.94 120.02,152.4 120.02,142.24 125.09,137.16 137.16,137.16 139.7,134.62 148.59,134.62 151.13,132.08 NODEMCU.1
A2
  Bottom 0.61: R10.2 180.98,241.94 179.07,243.84 J6.6 179.07,254 176.53,256.54 122.55,256.54 120.02,254 120.02,243.84 125.09,238.76 137.16,238.76 139.7,236.22 148.59,236.22 151.13,233.68 NODEMCU1.1
A3  (via drill 0.35 pad 1.15)
  Top 0.61: v62.23,240.67 v62.23,227.33 | v33.02,201.93 v43.18,201.93
  Bottom 0.61: U$4.SIG 17.78,200.66 19.05,201.93 v33.02,201.93 | U$3.SIG 63.5,200.66 62.23,201.93 | v43.18,201.93 62.23,201.93 | 62.23,201.93 v62.23,227.33 | J7.6 66.04,250.19 62.23,246.38 v62.23,240.67
AIN1
  Bottom 0.61: J1.5 SHIFT2.2
AIN2
  Bottom 0.61: SHIFT2.1 J1.6
AIN3
  Bottom 0.61: PONTEH.AIN2 J3.5
AIN4
  Bottom 0.61: J3.4 PONTEH.AIN1
AIN5
  Bottom 0.61: PONTEH1.AIN2 J5.5
AIN6
  Bottom 0.61: J5.4 PONTEH1.AIN1
AIN7
  Bottom 0.61: SHIFT4.1 J8.6
AIN8
  Bottom 0.61: J8.5 SHIFT4.2
BAT
  Bottom 0.61: U$1.C11 63.5,79.38 64.77,78.11 64.77,65.41 66.67,63.5 91.44,63.5 95.25,67.31 95.25,144.78 86.99,153.03 72.39,153.03 71.12,151.77 J2.4
BAT1  (via drill 1 pad 1.3)
  Top 0.61: v147.32,142.24 v147.32,130.81
  Bottom 0.61: R6.1 R7.2 137.16,119.38 147.32,129.54 v147.32,130.81 | J4.4 173.99,152.4 172.72,153.67 148.59,153.67 147.32,152.4 v147.32,142.24
BAT2  (via drill 1 pad 1.3)
  Top 0.61: v147.32,243.84 v147.32,232.41
  Bottom 0.61: R15.1 R16.2 137.16,220.98 147.32,231.14 v147.32,232.41 | J6.4 173.99,254 172.72,255.27 148.59,255.27 147.32,254 v147.32,243.84
BAT3
  Bottom 0.61: U$3.C11 63.5,181.61 64.77,180.34 64.77,167.64 66.67,165.74 91.44,165.74 95.25,169.55 95.25,247.01 86.99,255.27 72.39,255.27 71.12,254 J7.4
BIN1
  Bottom 0.61: J1.3 SHIFT2.4
BIN2
  Bottom 0.61: SHIFT2.5 J1.2
BIN3
  Bottom 0.61: J3.2 PONTEH.BIN1
BIN4
  Bottom 0.61: PONTEH.BIN2 J3.1
BIN5
  Bottom 0.61: J5.2 PONTEH1.BIN1
BIN6
  Bottom 0.61: PONTEH1.BIN2 J5.1
BIN7
  Bottom 0.61: J8.3 SHIFT4.4
BIN8
  Bottom 0.61: SHIFT4.5 J8.2
BOOST
  Bottom 0.61: CHAVE2.3 114.3,93.98 119.38,88.9 BOOST.1 127,88.9 128.27,87.63 R6.2
BOOST1
  Bottom 0.61: CHAVE3.3 114.3,195.58 119.38,190.5 BOOST1.1 127,190.5 128.27,189.23 R15.2
BOTAO
  Bottom 0.813: CIMA.4 22.86,11.43 25.4,8.89 CONECTOR.5
BOTAO1
  Bottom 0.61: J2.7 63.5,151.77 66.04,154.31 87.63,154.31 96.52,145.41 96.52,66.68 92.08,62.23 53.98,62.23 50.8,65.41 CIMA1.5
BOTAO2
  Bottom 0.813: CIMA2.4 73.66,11.43 76.2,8.89 CONECTOR1.5
BOTAO3
  Bottom 0.61: BOTAO.2 NODEMCU.29 176.53,107.95 175.9,108.59 175.9,112.4 176.53,113.03 182.25,113.03 R4.1 184.78,135.25 186.06,136.53 186.06,149.22 184.15,151.13 J4.7
BOTAO4
  Bottom 0.61: BOTAO1.2 NODEMCU1.29 176.53,209.55 175.9,210.19 175.9,214 176.53,214.63 182.25,214.63 R13.1 184.78,236.86 186.06,238.12 186.06,250.82 184.15,252.73 J6.7
BOTAO5
  Bottom 0.61: J7.7 63.5,254 66.04,256.54 87.63,256.54 96.52,247.65 96.52,168.91 92.08,164.47 53.98,164.47 50.8,167.64 CIMA3.5
BUZZER
  Bottom 0.61: NODEMCU.30 194.31,110.49 195.58,111.76 BUZZER.2
BUZZER1
  Bottom 0.61: NODEMCU1.30 194.31,212.09 195.58,213.36 BUZZER1.2
CHARGER
  Bottom 0.61: CHAVE2.1 114.3,88.9 122.55,80.65 CHARGER.BAT+
CHARGER1
  Bottom 0.61: CHAVE3.1 114.3,190.5 122.55,182.25 CHARGER1.BAT+
CLK
  Bottom 0.61: J2.1 SHIFT1.11 78.74,130.18 76.83,128.27 55.25,128.27 45.72,118.75 24.13,118.75 20.32,122.56 SHIFT2.11
CLK1
  Bottom 0.61: J4.1 163.83,148.59 163.83,95.89 172.09,87.63 NODEMCU.21
CLK2
  Bottom 0.61: J6.1 163.83,250.19 163.83,197.49 172.09,189.23 NODEMCU1.21
CLK3
  Bottom 0.61: J7.1 SHIFT3.11 78.74,232.41 76.83,230.5 55.25,230.5 45.72,220.98 24.13,220.98 20.32,224.79 SHIFT4.11
DATA
  Bottom 0.61: SHIFT1.14 71.12,135.25 73.66,137.8 J2.3
DATA1
  Bottom 0.61: NODEMCU.23 173.36,92.71 168.91,97.16 168.91,148.59 J4.3
DATA2
  Bottom 0.61: NODEMCU1.23 173.36,194.31 168.91,198.75 168.91,250.19 J6.3
DATA3
  Bottom 0.61: SHIFT3.14 71.12,237.49 73.66,240.03 J7.3
ECHO
  Bottom 0.61: R2.2 190.5,96.52 191.77,95.25 HC-SR04.2
ECHO1
  Bottom 0.61: R11.2 190.5,198.12 191.77,196.85 HC-SR01.2
EN1
  Bottom 0.61: SHIFT1.5 U$1.EN
EN2
  Bottom 0.61: U$2.EN 30.48,94.62 33.66,91.44 38.74,91.44 40.64,93.34 40.64,114.94 42.55,116.84 46.36,116.84 56.52,127 78.1,127 78.74,126.37 SHIFT1.6
EN3
  Bottom 0.61: SHIFT3.5 U$3.EN
EN4
  Bottom 0.61: U$4.EN 30.48,196.85 33.66,193.68 38.74,193.68 40.64,195.58 40.64,217.17 42.55,219.08 46.36,219.08 56.52,229.24 78.1,229.24 78.74,228.6 SHIFT3.6
GND
  pour Bottom (isolate 0.813): 0,1.27 49.53,1.27 49.53,50.8 0,50.8
GND1  (via drill 0.35 pad 1.15)
  Top 0.61: v73.02,130.81 v80.01,130.81 | v12.7,125.09 v12.7,120.02
  Bottom 0.61: 15.24,130.18 16.51,128.91 24.13,128.91 25.4,127.63 SHIFT2.13 25.4,124.46 27.3,122.56 44.45,122.56 52.71,130.81 v73.02,130.81 73.66,131.44 SHIFT1.13 | 15.24,130.18 SHIFT2.8 15.24,135.25 13.97,136.53 LED_CONEXAO.1 6.35,136.53 5.08,137.8 5.08,140.34 6.35,141.61 | U$2.GND 35.56,113.66 34.29,114.94 17.78,114.94 v12.7,120.02 MIC.2 6.35,120.02 5.08,118.75 5.08,106.68 LDR2.1 | 15.24,130.18 12.7,127.63 v12.7,125.09 | SHIFT1.8 83.82,125.73 80.01,129.54 v80.01,130.81 | LED_BATERIA.1 6.35,141.61 | 6.35,141.61 5.08,142.88 5.08,145.41 10.16,150.5 J1.1
  pour Bottom (isolate 0.813): 0,59.06 99.06,59.06 99.06,158.12 0,158.12
GND2
  pour Bottom (isolate 0.813): 50.8,1.27 100.33,1.27 100.33,50.8 50.8,50.8
GND3
  pour Bottom (isolate 1.27): 101.75,0.13 152.4,0.13 152.32,0.2 152.32,50.83 101.68,50.83 101.68,0.05
GND4
  pour Bottom (isolate 1.27): 153.64,-0.05 153.82,0.13 204.47,0.13 204.39,0.2 204.39,50.83 153.75,50.83
GND5  (via drill 1 pad 1.3)
  Top 0.61: v144.78,142.24 v144.78,132.72 | v165.1,74.93 v165.1,69.85
  Bottom 0.61: LED_ON.1 BATERIA.1 110.49,109.22 118.11,101.6 118.11,93.98 120.65,91.44 BOOST.2 R7.1 131.45,89.54 131.45,84.45 133.35,82.55 133.35,66.04 | PONTEH.GND1 128.27,125.73 129.54,124.46 139.7,124.46 140.97,125.73 PONTEH.GND2 140.97,131.44 142.24,132.72 v144.78,132.72 147.96,132.72 149.23,131.44 149.23,112.4 147.96,111.12 147.96,109.22 149.23,107.95 NODEMCU.2 | 186.06,96.52 189.87,92.71 HC-SR04.1 | R1.1 R4.2 189.87,121.28 BUZZER.1 198.12,115.57 200.53,113.16 200.53,81.28 184.02,64.77 166.37,64.77 165.1,66.04 | NODEMCU.17 C1.2 166.37,77.47 165.1,76.2 v165.1,74.93 | J3.6 123.19,152.4 124.46,153.67 138.43,153.67 140.97,151.13 PONTEH.GND3 141.22,142.24 v144.78,142.24 | 133.35,66.04 132.08,64.77 CHARGER.BAT- | 133.35,66.04 134.62,64.77 163.83,64.77 165.1,66.04 | R3.1 186.06,96.52 | 186.06,96.52 184.78,95.25 NODEMCU.24 | v165.1,69.85 165.1,66.04
  pour Bottom (isolate 0.813): 102.87,59.69 201.93,59.69 201.93,158.75 102.87,158.75
GND6  (via drill 1 pad 1.3)
  Top 0.61: v144.78,243.84 v144.78,234.31 | v165.1,176.53 v165.1,171.45
  Bottom 0.61: LED_ON1.1 BATERIA1.1 110.49,210.82 118.11,203.2 118.11,195.58 120.65,193.04 BOOST1.2 R16.1 131.45,191.13 131.45,186.06 133.35,184.15 133.35,167.64 | PONTEH1.GND1 128.27,227.33 129.54,226.06 139.7,226.06 140.97,227.33 PONTEH1.GND2 140.97,233.05 142.24,234.31 v144.78,234.31 147.96,234.31 149.23,233.05 149.23,214 147.96,212.72 147.96,210.82 149.23,209.55 NODEMCU1.2 | 186.06,198.12 189.87,194.31 HC-SR01.1 | R10.1 R13.2 189.87,222.88 BUZZER1.1 198.12,217.17 200.53,214.76 200.53,182.88 184.02,166.37 166.37,166.37 165.1,167.64 | NODEMCU1.17 C2.2 166.37,179.07 165.1,177.8 v165.1,176.53 | J5.6 123.19,254 124.46,255.27 138.43,255.27 140.97,252.73 PONTEH1.GND3 141.22,243.84 v144.78,243.84 | 133.35,167.64 132.08,166.37 CHARGER1.BAT- | 133.35,167.64 134.62,166.37 163.83,166.37 165.1,167.64 | R12.1 186.06,198.12 | 186.06,198.12 184.78,196.85 NODEMCU1.24 | v165.1,171.45 165.1,167.64
  pour Bottom (isolate 0.813): 102.87,161.29 201.93,161.29 201.93,260.35 102.87,260.35
GND7  (via drill 0.35 pad 1.15)
  Top 0.61: v73.02,233.05 v80.01,233.05 | v12.7,227.33 v12.7,222.25
  Bottom 0.61: 15.24,232.41 16.51,231.14 24.13,231.14 25.4,229.87 SHIFT4.13 25.4,226.69 27.3,224.79 44.45,224.79 52.71,233.05 v73.02,233.05 73.66,233.68 SHIFT3.13 | 15.24,232.41 SHIFT4.8 15.24,237.49 13.97,238.76 LED_CONEXAO1.1 6.35,238.76 5.08,240.03 5.08,242.57 6.35,243.84 | U$4.GND 35.56,215.9 34.29,217.17 17.78,217.17 v12.7,222.25 MIC1.2 6.35,222.25 5.08,220.98 5.08,208.91 LDR4.1 | 15.24,232.41 12.7,229.87 v12.7,227.33 | SHIFT3.8 83.82,227.97 80.01,231.78 v80.01,233.05 | LED_BATERIA1.1 6.35,243.84 | 6.35,243.84 5.08,245.11 5.08,247.65 10.16,252.73 J8.1
  pour Bottom (isolate 0.813): 0,161.29 99.06,161.29 99.06,260.35 0,260.35
LATCH
  Bottom 0.61: J2.2 SHIFT1.12 76.2,131.44 74.3,129.54 53.98,129.54 45.09,120.65 26.04,120.65 22.86,123.83 SHIFT2.12
LATCH1
  Bottom 0.61: J4.2 166.37,148.59 166.37,96.52 172.72,90.17 NODEMCU.22
LATCH2
  Bottom 0.61: J6.2 166.37,250.19 166.37,198.12 172.72,191.77 NODEMCU1.22
LATCH3
  Bottom 0.61: J7.2 SHIFT3.12 76.2,233.68 74.3,231.78 53.98,231.78 45.09,222.88 26.04,222.88 22.86,226.06 SHIFT4.12
LDR1  (via drill 1)
  Top 0.61: v90.17,86.36 v90.17,82.55
  Bottom 0.61: v90.17,82.55 67.31,82.55 66.04,81.28 U$1.C10 | LDR1.2 v90.17,86.36
LDR2
  Bottom 0.61: U$2.C5 33.02,81.92 31.75,83.19 21.59,83.19 10.79,93.98 10.79,106.05 9.53,107.31 LDR2.2
LDR3  (via drill 1)
  Top 0.61: v90.17,188.59 v90.17,184.78
  Bottom 0.61: v90.17,184.78 67.31,184.78 66.04,183.52 U$3.C10 | LDR3.2 v90.17,188.59
LDR4
  Bottom 0.61: U$4.C5 33.02,184.15 31.75,185.42 21.59,185.42 10.79,196.22 10.79,208.28 9.53,209.55 LDR4.2
LED_BATERIA
  Bottom 0.61: SHIFT2.7 R9.2
LED_BATERIA1
  Bottom 0.61: SHIFT4.7 R18.2
LED_CONEXAO
  Bottom 0.61: R8.2 SHIFT2.6
LED_CONEXAO1
  Bottom 0.61: R17.2 SHIFT4.6
MIC
  Bottom 0.61: U$2.C4 35.56,81.92 33.02,84.45 22.86,84.45 13.33,93.98 13.33,115.57 11.43,117.47 MIC.3
MIC1
  Bottom 0.61: U$4.C4 35.56,184.15 33.02,186.69 22.86,186.69 13.33,196.22 13.33,217.81 11.43,219.71 MIC1.3
N$1
  Bottom 0.61: PINOS_ESQUERDA.2 U$1.C9
N$2
  Bottom 0.61: U$1.C8 PINOS_ESQUERDA.4
N$3
  Bottom 0.61: PINOS_ESQUERDA.6 U$1.C7
N$4
  Bottom 0.61: U$1.C6 PINOS_ESQUERDA.8
N$5  (via drill 0.35 pad 1.15)
  Top 0.61: v66.67,140.97 v81.28,140.97
  Bottom 0.61: SHIFT2.14 27.94,127.63 29.21,128.91 45.09,128.91 50.8,134.62 57.15,134.62 63.5,134.62 66.67,137.8 v66.67,140.97 | SHIFT1.9 83.82,139.7 82.55,140.97 v81.28,140.97
N$6
  Bottom 0.61: PINOS_ESQUERDA.10 U$1.C5
N$7
  Bottom 0.61: U$1.C4 PINOS_ESQUERDA.12
N$8
  Bottom 0.61: PINOS_DIREITA.2 U$2.C15
N$9
  Bottom 0.61: U$2.C14 PINOS_DIREITA.4
N$10
  Bottom 0.61: PINOS_DIREITA.6 U$2.C13
N$11
  Bottom 0.61: U$2.C12 PINOS_DIREITA.8
N$12
  Bottom 0.61: U$2.C11 PINOS_DIREITA.10
N$13
  Bottom 0.61: PINOS_DIREITA.12 U$2.C10
N$14
  Bottom 0.61: U$2.C9 PINOS_DIREITA.14
N$15
  Bottom 0.61: PINOS_DIREITA.16 U$2.C8
N$16
  Bottom 0.61: U$2.C7 PINOS_DIREITA.18
N$17
  Bottom 0.61: PINOS_DIREITA.20 U$2.C6
N$18
  Bottom 0.61: PINOS_ESQUERDA.14 U$1.C3
N$19
  Bottom 0.61: U$1.C2 PINOS_ESQUERDA.16
N$20
  Bottom 0.61: PINOS_ESQUERDA.18 U$1.C1
N$21
  Bottom 0.61: U$1.C0 PINOS_ESQUERDA.20
N$22
  Bottom 0.61: LED_CONEXAO.2 8.89,139.06 10.16,140.34 19.05,140.34 20.32,141.61 R8.1
N$23
  Bottom 0.61: R9.1 10.16,145.41 8.89,144.15 LED_BATERIA.2
N$24
  Bottom 0.813: BAT_ESQ.2 CH_ESQ.2 113.03,43.18 114.3,44.45 139.7,44.45 140.97,43.18 CH_DIR.2
N$25
  Bottom 0.813: CH_ESQ.3 CH_DIR.1 138.43,10.16 139.7,8.89 BAT_DIR.1
N$26
  Bottom 0.813: M_DIR.1 CH_DIR.3
N$27
  Bottom 0.813: M_ESQ.2 CH_ESQ.1
N$28
  Bottom 0.813: M_ESQ.1 109.22,24.13 107.95,22.86 107.95,6.35 110.26,4.04 125.96,4.04 128.27,6.35 | 128.27,6.35 CHAVE.2 | 128.27,6.35 130.58,4.04 143.74,4.04 146.05,6.35 146.05,11.43 143.51,13.97 M_DIR.2
N$29
  Bottom 0.813: BAT_ESQ.1 110.49,7.62 111.76,6.35 124.46,6.35 125.73,7.62 CHAVE.1 125.73,10.16 127,11.43 129.54,11.43 130.81,10.16 130.81,7.62 132.08,6.35 142.24,6.35 143.51,7.62 BAT_DIR.2
N$30
  Bottom 0.813: BAT_ESQ1.2 CH_ESQ1.2 165.1,43.18 166.37,44.45 191.77,44.45 193.04,43.18 CH_DIR1.2
N$31
  Bottom 0.813: CH_ESQ1.3 CH_DIR1.1 190.5,10.16 191.77,8.89 BAT_DIR1.1
N$32
  Bottom 0.813: M_DIR1.1 CH_DIR1.3
N$33
  Bottom 0.813: M_ESQ1.2 CH_ESQ1.1
N$34
  Bottom 0.813: M_ESQ1.1 161.29,24.13 160.02,22.86 160.02,6.35 162.33,4.04 178.03,4.04 180.34,6.35 | 180.34,6.35 CHAVE1.2 | 180.34,6.35 182.65,4.04 195.81,4.04 198.12,6.35 198.12,11.43 195.58,13.97 M_DIR1.2
N$35
  Bottom 0.813: BAT_ESQ1.1 162.56,7.62 163.83,6.35 176.53,6.35 177.8,7.62 CHAVE1.1 177.8,10.16 179.07,11.43 181.61,11.43 182.88,10.16 182.88,7.62 184.15,6.35 194.31,6.35 195.58,7.62 BAT_DIR1.2
N$36
  Bottom 0.61: PONTEH.B2 135.89,128.27 131.45,132.72 122.55,132.72 114.94,140.34 114.94,152.91 119.38,157.35 184.91,157.35 195.58,146.69 MOTORB.2
N$37
  Bottom 0.61: PONTEH.B1 138.43,128.27 132.08,134.62 124.46,134.62 117.47,141.61 117.47,152.4 121.28,156.21 182.88,156.21 192.41,146.69 192.41,140.34 194.31,138.43 MOTORB.1
N$39
  Bottom 0.61: PONTEH.A1 130.81,128.27 130.18,128.91 118.74,128.91 MOTORA.2
N$40
  Bottom 0.61: PONTEH.A2 133.35,128.27 130.81,130.81 119.38,130.81 MOTORA.1
N$41
  Bottom 0.61: NODEMCU.28 R3.2 R2.1
N$42
  Bottom 0.61: LED_ON.2 R5.1
N$43
  Bottom 0.61: PONTEH1.B2 135.89,229.87 131.45,234.31 122.55,234.31 114.94,241.94 114.94,254.51 119.38,258.95 184.91,258.95 195.58,248.29 MOTORB1.2
N$44
  Bottom 0.61: PONTEH1.B1 138.43,229.87 132.08,236.22 124.46,236.22 117.47,243.2 117.47,254 121.28,257.81 182.88,257.81 192.41,248.29 192.41,241.94 194.31,240.03 MOTORB1.1
N$45
  Bottom 0.61: PONTEH1.A1 130.81,229.87 130.18,230.5 118.74,230.5 MOTORA1.2
N$48
  Bottom 0.61: PONTEH1.A2 133.35,229.87 130.81,232.41 119.38,232.41 MOTORA1.1
N$49
  Bottom 0.61: NODEMCU1.28 R12.2 R11.1
N$50
  Bottom 0.61: LED_ON1.2 R14.1
N$51  (via drill 0.35 pad 1.15)
  Top 0.61: v66.67,243.2 v81.28,243.2
  Bottom 0.61: SHIFT4.14 27.94,229.87 29.21,231.14 45.09,231.14 50.8,236.86 57.15,236.86 63.5,236.86 66.67,240.03 v66.67,243.2 | SHIFT3.9 83.82,241.94 82.55,243.2 v81.28,243.2
N$55
  Bottom 0.61: PINOS_ESQUERDA1.2 U$3.C9
N$56
  Bottom 0.61: U$3.C8 PINOS_ESQUERDA1.4
N$57
  Bottom 0.61: PINOS_ESQUERDA1.6 U$3.C7
N$58
  Bottom 0.61: U$3.C6 PINOS_ESQUERDA1.8
N$59
  Bottom 0.61: PINOS_ESQUERDA1.10 U$3.C5
N$60
  Bottom 0.61: U$3.C4 PINOS_ESQUERDA1.12
N$61
  Bottom 0.61: PINOS_ESQUERDA1.14 U$3.C3
N$62
  Bottom 0.61: U$3.C2 PINOS_ESQUERDA1.16
N$63
  Bottom 0.61: PINOS_ESQUERDA1.18 U$3.C1
N$64
  Bottom 0.61: U$3.C0 PINOS_ESQUERDA1.20
N$65
  Bottom 0.61: PINOS_DIREITA1.2 U$4.C15
N$66
  Bottom 0.61: U$4.C14 PINOS_DIREITA1.4
N$67
  Bottom 0.61: PINOS_DIREITA1.6 U$4.C13
N$68
  Bottom 0.61: U$4.C12 PINOS_DIREITA1.8
N$69
  Bottom 0.61: U$4.C11 PINOS_DIREITA1.10
N$70
  Bottom 0.61: PINOS_DIREITA1.12 U$4.C10
N$71
  Bottom 0.61: U$4.C9 PINOS_DIREITA1.14
N$72
  Bottom 0.61: PINOS_DIREITA1.16 U$4.C8
N$73
  Bottom 0.61: U$4.C7 PINOS_DIREITA1.18
N$74
  Bottom 0.61: PINOS_DIREITA1.20 U$4.C6
N$75
  Bottom 0.61: LED_CONEXAO1.2 8.89,241.3 10.16,242.57 19.05,242.57 20.32,243.84 R17.1
N$76
  Bottom 0.61: R18.1 10.16,247.65 8.89,246.38 LED_BATERIA1.2
PWMA
  Bottom 0.61: NODEMCU.20 171.45,85.09 161.29,95.25 161.29,130.81 154.94,137.16 140.34,137.16 137.16,140.34 125.09,140.34 123.19,142.24 PONTEH.PWMA
PWMA1
  Bottom 0.61: NODEMCU1.20 171.45,186.69 161.29,196.85 161.29,232.41 154.94,238.76 140.34,238.76 137.16,241.94 125.09,241.94 123.19,243.84 PONTEH1.PWMA
PWMB  (via drill 1)
  Top 0.61: v161.29,139.7 v173.99,139.7
  Bottom 0.61: PONTEH.PWMB 138.43,142.24 140.97,139.7 v161.29,139.7 | NODEMCU.26 175.26,100.33 173.99,101.6 v173.99,139.7
PWMB1  (via drill 1)
  Top 0.61: v161.29,241.3 v173.99,241.3
  Bottom 0.61: PONTEH1.PWMB 138.43,243.84 140.97,241.3 v161.29,241.3 | NODEMCU1.26 175.26,201.93 173.99,203.2 v173.99,241.3
S0
  Bottom 0.61: U$2.S3 20.32,90.81 25.4,85.73 68.58,85.73 73.66,90.81 U$1.S0 SHIFT1.4
S1
  Bottom 0.61: U$2.S2 22.86,92.08 27.94,87 66.04,87 71.12,92.08 U$1.S1 SHIFT1.3
S2
  Bottom 0.61: U$2.S1 25.4,93.34 30.48,88.27 63.5,88.27 68.58,93.34 U$1.S2 SHIFT1.2
S3
  Bottom 0.61: U$2.S0 27.94,94.62 33.02,89.54 60.96,89.54 66.04,94.62 U$1.S3 SHIFT1.1
S4
  Bottom 0.61: U$4.S0 27.94,196.85 33.02,191.77 60.96,191.77 66.04,196.85 U$3.S3 SHIFT3.1
S5
  Bottom 0.61: U$4.S1 25.4,195.58 30.48,190.5 63.5,190.5 68.58,195.58 U$3.S2 SHIFT3.2
S6
  Bottom 0.61: U$4.S2 22.86,194.31 27.94,189.23 66.04,189.23 71.12,194.31 U$3.S1 SHIFT3.3
S7
  Bottom 0.61: U$4.S3 20.32,193.04 25.4,187.96 68.58,187.96 73.66,193.04 U$3.S0 SHIFT3.4
STBY
  Bottom 0.61: SHIFT2.3 J1.4
STBY1
  Bottom 0.61: PONTEH.STBY J3.3
STBY2
  Bottom 0.61: PONTEH1.STBY J5.3
STBY3
  Bottom 0.61: SHIFT4.3 J8.4
T1
  Bottom 0.813: ESQUERDA.6 13.97,31.75 17.78,27.94 CONECTOR.8
T2
  Bottom 0.813: CIMA.6 17.78,35.56 20.32,33.02 CONECTOR.7
T3
  Bottom 0.813: CONECTOR.4 CIMA.2
T4
  Bottom 0.813: CONECTOR.3 30.48,27.94 34.29,31.75 DIREITA.6
T5
  Bottom 0.813: DIREITA.4 35.56,26.67 33.02,24.13 CONECTOR.2
T6
  Bottom 0.813: DIREITA.2 36.83,21.59 35.56,20.32 CONECTOR.1
T7
  Bottom 0.813: ESQUERDA.2 11.43,21.59 12.7,20.32 CONECTOR.10
T8
  Bottom 0.813: ESQUERDA.4 12.7,26.67 15.24,24.13 CONECTOR.9
T9
  Bottom 0.61: CIMA1.10 U$2.C3
T10
  Bottom 0.61: U$2.C2 CIMA1.9
T11
  Bottom 0.61: U$2.C1 CIMA1.8
T12
  Bottom 0.61: CIMA1.7 U$2.C0
T13
  Bottom 0.61: U$1.C15 CIMA1.4
T14
  Bottom 0.61: CIMA1.3 U$1.C14
T15
  Bottom 0.61: U$1.C13 CIMA1.2
T16
  Bottom 0.61: CIMA1.1 U$1.C12
T17
  Bottom 0.813: ESQUERDA1.2 62.23,21.59 63.5,20.32 CONECTOR1.10
T18
  Bottom 0.813: ESQUERDA1.6 64.77,31.75 68.58,27.94 CONECTOR1.8
T19
  Bottom 0.813: CIMA2.6 68.58,35.56 71.12,33.02 CONECTOR1.7
T20
  Bottom 0.813: CONECTOR1.4 CIMA2.2
T21
  Bottom 0.813: CONECTOR1.3 81.28,27.94 85.09,31.75 DIREITA1.6
T22
  Bottom 0.813: DIREITA1.4 86.36,26.67 83.82,24.13 CONECTOR1.2
T23
  Bottom 0.813: DIREITA1.2 87.63,21.59 86.36,20.32 CONECTOR1.1
T24
  Bottom 0.813: ESQUERDA1.4 63.5,26.67 66.04,24.13 CONECTOR1.9
T25
  Bottom 0.61: CIMA3.10 U$4.C3
T26
  Bottom 0.61: U$4.C2 CIMA3.9
T27
  Bottom 0.61: U$4.C1 CIMA3.8
T28
  Bottom 0.61: CIMA3.7 U$4.C0
T29
  Bottom 0.61: U$3.C15 CIMA3.4
T30
  Bottom 0.61: CIMA3.3 U$3.C14
T31
  Bottom 0.61: U$3.C13 CIMA3.2
T32
  Bottom 0.61: CIMA3.1 U$3.C12
TRIG
  Bottom 0.61: HC-SR04.3 194.31,97.79 189.23,102.87 NODEMCU.27
TRIG1
  Bottom 0.61: HC-SR01.3 194.31,199.39 189.23,204.47 NODEMCU1.27
VAMP
  Bottom 0.61: AMP1.2 AMP.1 107.95,99.06 106.81,97.92 106.81,92.58 107.95,91.44 CHAVE2.2
VAMP1
  Bottom 0.61: AMP3.2 AMP2.1 107.95,200.66 106.81,199.52 106.81,194.18 107.95,193.04 CHAVE3.2
VCC
  Bottom 0.813: 25.4,46.99 26.44,48.03 29.44,48.03 30.48,46.99 CIMA.1 30.48,35.56 31.75,34.29 45.72,34.29 46.76,33.25 46.76,30.48 45.49,29.21 | CIMA.3 25.4,46.99 | 25.4,46.99 24.36,48.03 21.59,48.03 20.32,46.76 | CIMA.5 20.32,46.76 | 20.32,46.76 19.05,48.03 16.51,48.03 15.24,46.76 15.24,35.56 13.97,34.29 5.08,34.29 3.81,33.02 3.81,30.48 5.08,29.21 5.31,29.21 | 5.31,29.21 ESQUERDA.5 | 5.31,29.21 4.04,27.94 4.04,25.4 5.31,24.13 | 5.31,24.13 ESQUERDA.3 | 5.31,24.13 4.04,22.86 4.04,20.32 5.31,19.05 ESQUERDA.1 8.89,19.05 10.16,17.78 10.16,5.08 11.43,3.81 21.59,3.81 22.86,5.08 CONECTOR.6 | DIREITA.1 45.72,19.05 46.76,20.09 46.76,22.86 45.49,24.13 | DIREITA.3 45.49,24.13 | 45.49,24.13 46.76,25.4 46.76,27.94 45.49,29.21 | 45.49,29.21 DIREITA.5
VCC1
  Bottom 0.813: 76.2,46.99 77.24,48.03 80.24,48.03 81.28,46.99 CIMA2.1 81.28,35.56 82.55,34.29 96.52,34.29 97.56,33.25 97.56,30.48 96.29,29.21 | CIMA2.3 76.2,46.99 | 76.2,46.99 75.16,48.03 72.39,48.03 71.12,46.76 | CIMA2.5 71.12,46.76 | 71.12,46.76 69.85,48.03 67.31,48.03 66.04,46.76 66.04,35.56 64.77,34.29 55.88,34.29 54.61,33.02 54.61,30.48 55.88,29.21 56.11,29.21 | 56.11,29.21 ESQUERDA1.5 | 56.11,29.21 54.84,27.94 54.84,25.4 56.11,24.13 | 56.11,24.13 ESQUERDA1.3 | 56.11,24.13 54.84,22.86 54.84,20.32 56.11,19.05 ESQUERDA1.1 59.69,19.05 60.96,17.78 60.96,5.08 62.23,3.81 72.39,3.81 73.66,5.08 CONECTOR1.6 | DIREITA1.1 96.52,19.05 97.56,20.09 97.56,22.86 96.29,24.13 | DIREITA1.3 96.29,24.13 | 96.29,24.13 97.56,25.4 97.56,27.94 96.29,29.21 | 96.29,29.21 DIREITA1.5

## Text on the board
Bottom: tampi | mux | 07/20 | tampi | 07/20 | mux | tampi | 07/20 | tampi | 07/20 | tampi | tampi | tampa | tampa | 07/20 | 07/20 | JOTA | JOTA | 07/20 | 07/20